# Altium PCB 海关全向控制器主控板电路V3.PcbDoc (part 3 of 3)
Units mil, origin at the board's own origin, x right, y up, seen from the top; angles counter-clockwise.
Board outline 7874.02 x 2362.2 mil, 2 copper layers (Top Layer, Bottom Layer), stack 42.17 mil thick; 192 components, 119 nets, 573 pads, 115 vias.
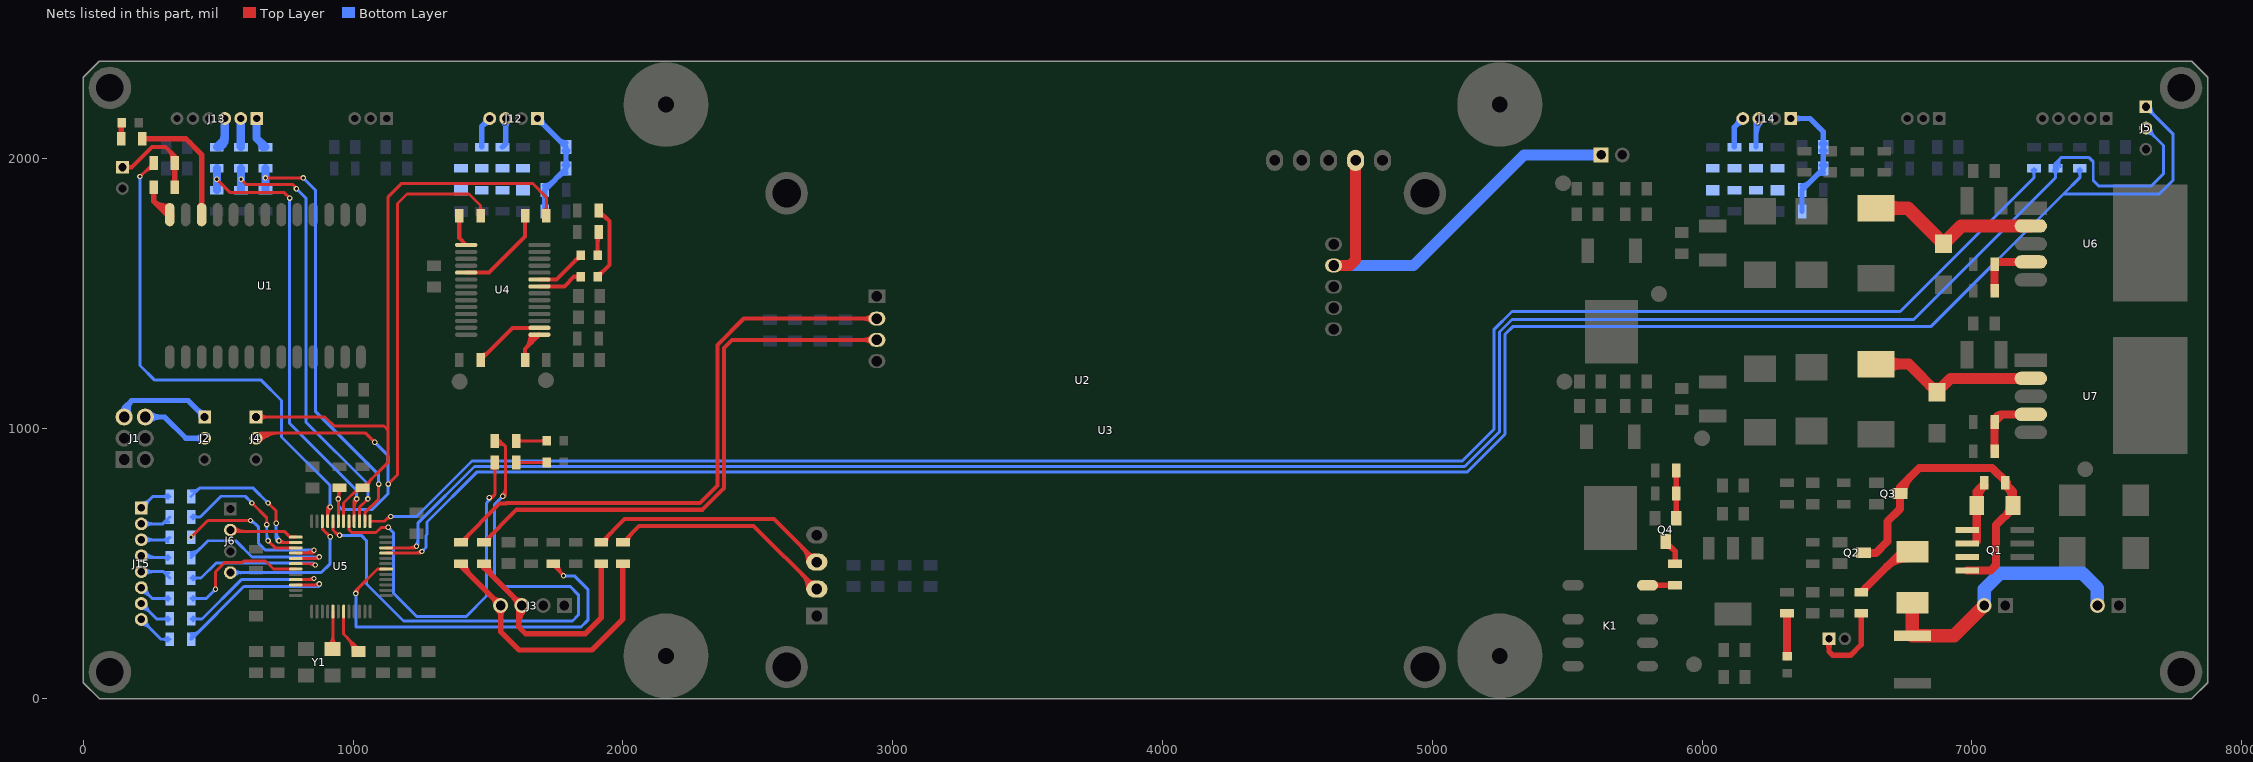
[diagram p3: the nets of this part, all layers, seen from the top]

## Via types
v1: diameter 20, hole 12, Top Layer to Bottom Layer, tented both sides, 70 vias
v2: diameter 60, hole 40, Top Layer to Bottom Layer, tented both sides, 26 vias
v3: diameter 50, hole 30, Top Layer to Bottom Layer, tented both sides, 9 vias
v4: diameter 30, hole 20, Top Layer to Bottom Layer, tented both sides, 5 vias
v5: diameter 40, hole 25, Top Layer to Bottom Layer, tented both sides, 3 vias
v6: diameter 35, hole 20, Top Layer to Bottom Layer, tented both sides, 2 vias

## Nets (pads, with @x,y where several pads share a name; then routed paths per layer and width w, separated by ;. In a path a pad name is that pad's centre, name@x,y a point inside that pad or via, vN(x,y) a via of type N, cw(c..) or ccw(c..) an arc to the next point about the centre after c; other vN are vias at no path point) (continued)
NetC62_2: C62.2 C63.2 J12.1 R45.2 R46.2 | length 633.3
  Bottom Layer w20: J12.1@1683.58,2136.38 cw(c1683.58,2103.49) 1706.84,2126.75 cw(c1730.09,2150) J12.1@1697.2,2150 ; J12.1@1683.58,2150 1789.37,2044.21 C62.2@1789.37,1964.79 1789.37,1964.37 1710.63,1885.63 R45.2@1710.63,1885.21 R46.2@1710.63,1805.63 ; R45.2@1710.63,1900.8 ccw(c1710.63,1937.43) 1736.53,1911.53 ; 1762.49,2071.1 ccw(c1789.37,2097.98) C63.2@1789.37,2059.96 ; 1763.47,1938.47 cw(c1789.37,1912.57) C62.2@1789.37,1949.2 ; C62.2@1782.52,1977.54 ccw(c1765.99,1994.08) 1789.37,1994.08 ccw(c1812.75,1994.08) C62.2@1796.22,1977.54 ; C63.2@1782.52,2031.62 cw(c1765.99,2015.08) 1789.37,2015.08 cw(c1812.75,2015.08) C63.2@1796.22,2031.62
NetC66_1: C66.1 R48.1 R49.1 R54.1
NetC67_1: C67.1 R51.1 R52.1 R55.2
NetC68_2: C68.2 C69.2 J14.1 R59.2 R60.2 | length 688.2
  Bottom Layer w20: J14.1@6328.58,2150 6400,2150 6449.37,2100.63 C69.2@6449.37,2044.37 C68.2@6449.37,1964.79 6449.37,1964.37 6370.63,1885.63 R60.2@6370.63,1885.21 R59.2@6370.63,1805.63 ; J14.1@6338.21,2140.37 cw(c6361.47,2117.11) 6361.47,2150 cw(c6361.47,2182.89) J14.1@6338.21,2159.63 ; R60.2@6370.63,1900.8 ccw(c6370.63,1937.43) 6396.53,1911.53 ; 6423.47,1938.47 cw(c6449.37,1912.57) C68.2@6449.37,1949.2 ; C68.2@6442.52,1977.54 ccw(c6425.99,1994.08) 6449.37,1994.08 ccw(c6472.75,1994.08) C68.2@6456.22,1977.54 ; C69.2@6442.52,2031.62 cw(c6425.99,2015.08) 6449.37,2015.08 cw(c6472.75,2015.08) C69.2@6456.22,2031.62 ; C69.2@6442.52,2057.12 ccw(c6425.99,2073.66) 6449.37,2073.66 ccw(c6472.75,2073.66) C69.2@6456.22,2057.12
NetC70_1: C70.1 R63.1 R64.1 R70.1
NetC71_1: C71.1 R66.1 R67.1 R71.2
NetD1_1: D1.1 R3.1 | length 79.8
  Top Layer w20: R3.1@140.63,2075 140.63,2132.13 D1.1@143.5,2135 ; 140.63,2112.22 cw(c164.32,2112.22) D1.1@147.57,2128.97
NetD2_1: D2.1 R14.2 | length 146.1
  Top Layer w15: D2.1@1900.66,1650.66 ccw(c1886.58,1664.74) 1906.5,1664.74 ccw(c1926.41,1664.74) D2.1@1912.33,1650.66 ; D2.1@1906.5,1642.86 1906.5,1725.95 R14.2@1910.43,1729.88 ; 1906.5,1690.62 cw(c1939.85,1690.62) R14.2@1916.27,1714.21
NetD2_2: D2.2 U4.23 | length 210.3
  Top Layer w15: U4.23@1690.83,1553.39 1753.39,1553.39 1842.86,1642.86 D2.2@1843.5,1642.86 ; 1824.97,1624.97 cw(c1843.5,1606.43) D2.2@1843.5,1632.65
NetD3_1: D3.1 R15.2 | length 345.3
  Top Layer w15: D3.1@1906.5,1563.72 1950,1607.22 1950,1769.46 R15.2@1910.43,1809.03 ; D3.1@1906.5,1573.93 ccw(c1906.5,1598.6) 1923.94,1581.16 ; R15.2@1910.43,1790.94 cw(c1910.43,1747.27) 1941.32,1778.15 ; D3.1@1914.74,1565.68 cw(c1929.9,1565.68) D3.1@1919.18,1576.4
NetD3_2: D3.2 U4.22 | length 198.8
  Top Layer w15: U4.22@1690.83,1527.8 1782.8,1527.8 1818.72,1563.72 D3.2@1843.5,1563.72 ; D3.2@1837.67,1557.88 ccw(c1823.59,1543.8) 1823.59,1563.72 ccw(c1823.59,1583.63) D3.2@1837.67,1569.55
NetD4_2: D4.2 R16.2 | length 191.9
  Top Layer w11: R16.2@1604.37,955 D4.2@1718.5,955 ; R16.2@1611.62,947.75 cw(c1629.11,930.26) 1629.11,955 cw(c1629.11,979.74) R16.2@1611.62,962.25 ; D4.2@1711.26,947.75 ccw(c1693.76,930.26) 1693.76,955 ccw(c1693.76,979.74) D4.2@1711.26,962.25
NetD5_2: D5.2 R17.2 | length 191.9
  Top Layer w11: R17.2@1604.37,875 D5.2@1718.5,875 ; R17.2@1611.62,867.75 cw(c1629.11,850.26) 1629.11,875 cw(c1629.11,899.74) R17.2@1611.62,882.25 ; D5.2@1711.26,867.75 ccw(c1693.76,850.26) 1693.76,875 ccw(c1693.76,899.74) D5.2@1711.26,882.25
NetD7_2: D7.2 L2.1 U6.2 | length 747.5
  Top Layer w50: L2.1@6645,1818.25 6762.53,1818.25 D7.2@6895,1685.79 6960.88,1751.67 U6.2@7218.56,1751.67 ; L2.1@6681.81,1801.13 cw(c6723.14,1759.8) 6723.14,1818.25 cw(c6723.14,1876.71) L2.1@6681.81,1835.38
NetD8_1: D8.1 Q1.4 Q2.3 Q3.3 R22.1 | length 1529.7
  Top Layer w30: Q2.3@6598.31,540 6645,540 6686.65,581.65 6686.65,656.65 6733.31,703.31 Q3.3@6733.31,760 6733.31,783.31 6805,855 7075,855 R22.1@7129.67,800.33 ; Q3.3@6745.87,760 cw(c6832.45,760) 6771.23,821.23 ; Q1.4@6982.64,475 7070,475 7090,495 7090,643.07 7151.93,705 D8.1@7151.93,742.46 ; R22.1@7123.93,789.55 cw(c7084.93,735.08) D8.1@7151.93,735.08 ; R22.1@7124.2,789.43 cw(c7116.01,754.46) 7151.93,754.46 ; R22.1@7124.37,795.02 7151.93,767.46 D8.1@7151.93,742.46 ; D8.1@7128.99,682.06 ccw(c7103.92,707.13) D8.1@7139.37,707.13 ; D8.1@7141.05,729.15 ccw(c7105.46,749.71) 7145.16,760.34 ; D8.1@7143.05,731.75 ccw(c7121.61,753.19) 7151.93,753.19 ccw(c7182.25,753.19) D8.1@7160.81,731.75 ; D8.1@7161.93,732.46 D8.1@7151.93,742.46
NetD9_2: D9.2 L3.1 U7.2 | length 803.3
  Top Layer w40: L3.1@6645,1239.92 6765.87,1239.92 D9.2@6870,1135.79 6920.88,1186.67 U7.2@7218.56,1186.67 ; L3.1@6685.34,1219.26 cw(c6735.21,1169.4) 6735.21,1239.92 cw(c6735.21,1310.45) L3.1@6685.34,1260.58 ; D9.2@6845.33,1160.45 ccw(c6870,1185.12) 6870,1150.24 ccw(c6870,1185.12) D9.2@6894.67,1160.45
NetD10_2: D10.2 R35.2 | length 159.1
  Top Layer w30: D10.2@6315,156.5 R35.2@6315,315.63
NetJ12_3: J12.3 R49.2 | length 179.4
  Bottom Layer w20: R49.2@1553.33,2044.37 1565.47,2056.51 J12.3@1565.47,2150 ; J12.3@1555.84,2140.37 cw(c1532.59,2117.11) 1565.47,2117.11 cw(c1598.36,2117.11) J12.3@1575.1,2140.37 ; R49.2@1559.11,2048.43 ccw(c1543.75,2063.79) 1565.47,2063.79
NetJ12_4: J12.4 R52.2 | length 169.6
  Bottom Layer w20: R52.2@1476.67,2044.37 1476.67,2120.25 J12.4@1506.42,2150 ; J12.4@1492.8,2150 cw(c1459.91,2150) 1483.16,2126.75 cw(c1506.42,2103.49) J12.4@1506.42,2136.38
NetJ13_1: J13.1 R47.1 | length 139.1
  Bottom Layer w30: J13.1@642.64,2150 642.64,2076.73 R47.1@675,2044.37 ; 656.92,2062.45 cw(c638.84,2044.37) R47.1@664.41,2044.37
NetJ13_2: J13.2 R50.1 | length 106.2
  Bottom Layer w30: J13.2@583.58,2150 583.58,2045.79 R50.1@585,2044.37
NetJ13_3: J13.3 R53.1 | length 229.4
  Bottom Layer w30: R53.1@495,2044.37 524.53,2073.9 ; R53.1@504.31,2044.9 ccw(c455.51,2093.7) 524.53,2093.7 ; R53.1@504.58,2045.07 ccw(c493.73,2073.9) 524.53,2073.9 ; R53.1@505.59,2044.37 cw(c531.16,2044.37) 513.08,2062.45 ; J13.3@524.53,2150 524.53,2073.9
NetJ14_3: J14.3 R64.2 | length 163.9
  Bottom Layer w20: R64.2@6200,2044.37 6200,2139.53 J14.3@6210.47,2150 ; 6200,2091.83 cw(c6268.64,2091.83) J14.3@6220.1,2140.37
NetJ14_4: J14.4 R67.2 | length 170.3
  Bottom Layer w20: R67.2@6120,2044.37 6120,2118.58 J14.4@6151.42,2150 ; J14.4@6137.8,2150 cw(c6104.91,2150) 6128.16,2126.75 cw(c6151.42,2103.49) J14.4@6151.42,2136.38
NetJ15_1: J15.1 R61.1 | length 230.8
  Bottom Layer w11: J15.1@215,706.69 257.34,749.03 R61.1@320.63,749.03 ; J15.1@215,724.81 ccw(c215,768.57) 245.94,737.63 ccw(c276.87,706.69) J15.1@233.12,706.69 ; R61.1@313.38,741.78 ccw(c295.89,724.29) 295.89,749.03 ccw(c295.89,773.77) R61.1@313.38,756.28
NetJ15_2: J15.2 R62.1 | length 210.1
  Bottom Layer w11: J15.2@215,647.64 294.81,647.64 ; J15.2@227.81,634.82 cw(c258.75,603.89) 258.75,647.64 cw(c258.75,691.39) J15.2@227.81,660.45 ; R62.1@317.9,653.73 ccw(c311.59,630.86) 294.81,647.64 ; R62.1@320.63,673.45 294.81,647.64
NetJ15_3: J15.3 R65.1 | length 217.1
  Bottom Layer w11: J15.3@215,588.58 311.33,588.58 R65.1@320.63,597.88 ; J15.3@227.81,575.77 cw(c258.75,544.83) 258.75,588.58 cw(c258.75,632.33) J15.3@227.81,601.4 ; 294.57,588.58 cw(c294.57,561.98) R65.1@313.38,580.79 ; 297.21,588.58 ccw(c297.21,611.46) R65.1@313.38,595.28
NetJ15_4: J15.4 R68.1 | length 249.1
  Bottom Layer w11: J15.4@215,529.53 222.22,522.3 R68.1@320.63,522.3 ; J15.4@220.04,534.56 ccw(c249.64,564.16) 249.64,522.3 ; J15.4@227.81,516.71 cw(c241.31,503.22) 241.31,522.3 ; J15.4@227.81,542.34 ccw(c276.19,590.72) 276.19,522.3 ; R68.1@313.38,515.06 ccw(c295.89,497.56) 295.89,522.3 ccw(c295.89,547.04) R68.1@313.38,529.55
NetJ15_5: J15.5 R69.1 | length 205.9
  Bottom Layer w11: J15.5@215,470.47 296.89,470.47 ; J15.5@227.81,457.66 cw(c258.75,426.72) 258.75,470.47 cw(c258.75,514.22) J15.5@227.81,483.29 ; R69.1@317,466.15 cw(c310.28,483.87) 296.89,470.47 ; R69.1@320.63,446.73 296.89,470.47
NetJ15_6: J15.6 R72.1 | length 229.9
  Bottom Layer w11: J15.6@215,393.3 cw(c215,349.54) 245.94,380.48 cw(c276.87,411.42) J15.6@233.12,411.42 ; J15.6@215,411.42 255.27,371.15 R72.1@320.63,371.15 ; R72.1@313.38,363.91 ccw(c295.89,346.41) 295.89,371.15 ccw(c295.89,395.89) R72.1@313.38,378.4
NetJ15_7: J15.7 R73.1 | length 236.7
  Bottom Layer w11: J15.7@215,334.24 cw(c215,290.49) 245.94,321.43 cw(c276.87,352.36) J15.7@233.12,352.36 ; J15.7@215,352.36 271.79,295.58 R73.1@320.63,295.58 ; R73.1@313.38,288.33 ccw(c295.89,270.83) 295.89,295.58 ccw(c295.89,320.32) R73.1@313.38,302.82
NetJ15_8: J15.8 R74.1 | length 243.6
  Bottom Layer w11: J15.8@215,275.19 cw(c215,231.43) 245.94,262.37 cw(c276.87,293.31) J15.8@233.12,293.31 ; J15.8@215,293.31 288.31,220 R74.1@320.63,220 ; R74.1@313.38,212.75 ccw(c295.89,195.26) 295.89,220 ccw(c295.89,244.74) R74.1@313.38,227.25
NetK1_8: K1.8 R29.2 | length 139.4
  Top Layer w20: K1.8@5797.8,419.61 5798.82,420.63 R29.2@5900,420.63 ; K1.8@5824.33,412.76 cw(c5843.33,393.75) 5843.33,420.63 ; K1.8@5824.33,426.45 ccw(c5838.39,440.52) 5838.39,420.63
NetQ4_1: Q4.1 R30.2 R32.1 | length 213.4
  Top Layer w20: Q4.1@5897.52,683.03 ccw(c5880.99,699.56) 5904.37,699.56 ccw(c5927.75,699.56) Q4.1@5911.22,683.03 ; Q4.1@5904.37,668.31 R32.1@5904.37,760 R30.2@5904.37,845
NetQ4_3: Q4.3 R29.1 | length 130.1
  Top Layer w20: Q4.3@5865,564.13 cw(c5865,521.74) 5894.98,551.72 ; Q4.3@5865,581.69 5900,546.69 R29.1@5900,499.37
NetR1_1: R1.1 R2.1 S1.1 | length 472.4
  Top Layer w15: S1.1@145,1969.37 179.37,1969.37 ; S1.1@157.4,1959.06 cw(c179.37,1940.8) 179.37,1969.37 ; S1.1@157.4,1979.68 ccw(c179.37,1997.94) 179.37,1969.37 ; 314.13,2035.87 cw(c273.1,1994.84) R1.1@331.12,1994.84 ; R1.1@334.66,2001.61 ccw(c328.39,2010.63) 339.37,2010.63 ; R1.1@339.37,1985 339.37,2010.63 ; R1.1@344.08,2001.61 cw(c350.35,2010.63) 339.37,2010.63 ; 179.37,1969.37 255,2045 305,2045 339.37,2010.63
  Top Layer w20: R2.1@339.37,1895 R1.1@339.37,1985
NetR2_2: R2.2 U1.34 | length 256.8
  Top Layer w20: R2.2@260.63,1895 260.63,1843.82 ; 286.32,1818.12 ccw(c314.6,1846.4) U1.34@323.36,1807.39 ; U1.34@312.02,1792.43 ccw(c324.02,1804.44) U1.34@327.74,1787.87 ; U1.34@318.98,1826.9 cw(c305.17,1888.36) 260.63,1843.82 ; U1.34@320.67,1783.78 260.63,1843.82
NetR3_2: R3.2 U1.32 | length 505.5
  Top Layer w20: R3.2@219.37,2075 380,2075 438.78,2016.22 U1.32@438.78,1783.78 ; U1.32@433.32,1824.83 ccw(c420.15,1838) 438.78,1838 ccw(c457.41,1838) U1.32@444.24,1824.83
NetR12_1: R12.1 U4.16 | length 302.2
  Top Layer w15: R12.1@1472.32,1255 1591.57,1374.25 U4.16@1690.83,1374.25 ; R12.1@1472.32,1273.09 ccw(c1472.32,1316.76) 1503.21,1285.88
NetR13_1: R13.1 U4.15 | length 251.5
  Top Layer w15: R13.1@1631.84,1270.67 ccw(c1617.76,1284.75) 1637.68,1284.75 ccw(c1657.59,1284.75) R13.1@1643.51,1270.67 ; R13.1@1637.68,1255 1637.68,1295.51 ; U4.15@1656.99,1348.63 cw(c1590.43,1342.76) 1637.68,1295.51 ; 1660.4,1318.24 ccw(c1632.2,1346.44) U4.15@1671.93,1349.95 ; U4.15@1683.13,1340.96 ccw(c1673.97,1350.13) U4.15@1686.87,1351.26 ; U4.15@1690.83,1348.66 1637.68,1295.51
NetR19_1: R19.1 R20.2 U6.4 | length 235.7
  Top Layer w30: R20.2@7084.37,1511.92 R19.1@7084.37,1610 7092.7,1618.33 U6.4@7218.56,1618.33
NetR21_1: R21.1 S2.1 | length 356.3
  Top Layer w20: S2.1@6460.84,211.82 cw(c6437.59,188.56) 6470.47,188.56 cw(c6503.36,188.56) S2.1@6480.1,211.82 ; S2.1@6470.47,221.45 6470.47,174.53 6485,160 6550,160 6590,200 R21.1@6590,315.63
NetR23_1: R23.1 R25.2 U7.4 | length 360.6
  Top Layer w30: R25.2@7084.37,916.92 R23.1@7084.37,1025 7112.7,1053.33 ; R23.1@7084.37,1035.59 ccw(c7084.37,1061.16) 7102.45,1043.08 ; R23.1@7084.9,1034.31 cw(c7130.82,988.39) 7130.82,1053.33 ; R23.1@7085.07,1034.57 cw(c7112.7,1023.6) 7112.7,1053.33 ; U7.4@7218.56,1053.33 7112.7,1053.33
NetR37_2: R37.2 U4.1 | length 150.5
  Top Layer w15: R37.2@1387.75,1774.33 cw(c1373.67,1760.25) 1393.58,1760.25 cw(c1413.5,1760.25) R37.2@1399.41,1774.33 ; R37.2@1393.58,1790 1393.58,1706.93 U4.1@1419.17,1681.34
NetR38_2: R38.2 U4.5 | length 382.5
  Top Layer w15: U4.5@1419.17,1578.98 1503.98,1578.98 1637.68,1712.68 R38.2@1637.68,1790 ; R38.2@1631.84,1774.33 cw(c1617.76,1760.25) 1637.68,1760.25 cw(c1657.59,1760.25) R38.2@1643.51,1774.33
NRST: C19.1 U5.7 | length 268.5
  Top Layer w11: U5.7@964.84,322.68 964.84,239.53 C19.1@1030,174.37 ; 978.63,225.74 cw(c927.26,174.37) C19.1@999.91,174.37 ; 997.41,206.96 cw(c964.82,174.37) C19.1@1010.91,174.37
PAD_D+: J3.3 R6.1 R10.1 | length 1042.7
  Top Layer w20: R10.1@1480.59,500.63 ccw(c1506.16,500.63) 1488.08,482.55 ; R10.1@1485,500.63 1485,485.63 J3.3@1625.63,345 ; R10.1@1500.59,500.63 ccw(c1574.44,500.63) 1522.22,448.41 ; J3.3@1608.07,345 ccw(c1565.68,345) 1595.65,374.98 ccw(c1625.63,404.95) J3.3@1625.63,362.56 ; 1614.51,275.76 cw(c1694.87,275.76) J3.3@1638.05,332.58 ; J3.3@1614.51,345 1614.51,265.49 1640,240 1860,240 1920,300 R6.1@1920,500.63
PAD_D-: J3.4 R4.1 R9.1 | length 1227.3
  Top Layer w20: R9.1@1400,500.63 1400,491.89 J3.4@1546.89,345 1546.89,248.11 1615,180 1885,180 2000,295 R4.1@2000,500.63 ; R9.1@1415.59,500.63 ccw(c1474.33,500.63) 1432.79,459.09 ; J3.4@1529.33,345 ccw(c1486.94,345) 1516.91,374.98 ccw(c1546.89,404.95) J3.4@1546.89,362.56 ; J3.4@1534.47,332.58 cw(c1504.5,302.61) 1546.89,302.61 cw(c1589.28,302.61) J3.4@1559.31,332.58
PADTEST: R7.1 U5.18 | length 1626.3
  Top Layer w11: v1(1010,390) 1010,400 1090.16,480.16 U5.18@1122.32,480.16 ; v1@1014.5,390 cw(c1049.51,390) 1024.75,414.75 ; R7.1@1751.09,500.65 ccw(c1788.53,499.45) 1762.04,472.96 ; R7.1@1762.08,500.3 ccw(c1823.32,498.33) v1(1780,455) R7.1@1745,490 ; v1@1775.5,455 ccw(c1764.64,455) 1772.32,462.68 ccw(c1780,470.36) v1@1780,459.5 ; v1@1775.65,456.16 ccw(c1765.16,458.98) 1774.57,464.41 ccw(c1783.98,469.84) v1@1781.16,459.35 ; R7.1@1745,490 1742,493 R7.1@1742,500.63 1745,497.63 R7.1@1745,490
  Bottom Layer w11: v1@1006.82,386.82 cw(c999.14,379.14) 1010,379.14 cw(c1020.86,379.14) v1@1013.18,386.82 ; v1(1010,390) 1010,265 1845,265 1870,290 1870,405 1820,455 v1(1780,455) ; v1@1783.18,451.82 cw(c1790.86,444.14) 1790.86,455 cw(c1790.86,465.86) v1@1783.18,458.18
POWLEDB1: R62.2 U5.39 | length 692.2
  Top Layer w11: v1@625,720.5 cw(c625,709.64) 632.68,717.32 cw(c640.36,725) v1@629.5,725 ; v1(625,725) 680,670 v1(680,645) ; v1@676.82,648.18 ccw(c669.14,655.86) 680,655.86 ccw(c690.86,655.86) v1@683.18,648.18 ; v1@685,580.5 cw(c685,569.64) 692.68,577.32 cw(c700.36,585) v1@689.5,585 ; v1(685,585) 711.1,558.9 U5.39@787.68,558.9
  Bottom Layer w11: R62.2@399.37,673.45 433.45,673.45 510,750 600,750 v1(625,725) ; R62.2@406.62,666.21 cw(c424.11,648.71) 424.11,673.45 cw(c424.11,698.2) R62.2@406.62,680.7 ; v1@620.5,725 ccw(c609.64,725) 617.32,732.68 ccw(c625,740.36) v1@625,729.5 ; v1@676.82,641.82 cw(c669.14,634.14) 680,634.14 cw(c690.86,634.14) v1@683.18,641.82 ; 680,607.93 ccw(c707.93,607.93) v1@688.18,588.18 ; v1(680,645) 680,590 v1(685,585)
POWLEDB2: R68.2 U5.41 | length 711.6
  Top Layer w11: U5.41@787.68,519.53 869.53,519.53 v1(875,525) ; 850.92,519.53 ccw(c850.92,549.08) v1@871.82,528.18
  Bottom Layer w11: R68.2@399.37,522.3 462.07,585 565,585 625,525 v1(875,525) ; R68.2@399.37,531.39 ccw(c399.37,553.34) R68.2@414.89,537.82 ; R68.2@399.37,542.39 ccw(c399.37,590.9) 433.67,556.6 ; v1@871.82,521.82 ccw(c864.14,514.14) 864.14,525 ccw(c864.14,535.86) v1@871.82,528.18
POWLEDB3: R72.2 U5.43 | length 569.3
  Top Layer w11: v1@486.82,408.18 ccw(c479.14,415.86) 490,415.86 ccw(c500.86,415.86) v1@493.18,408.18 ; v1(490,405) 490,470 525,505 590,505 595,510 675,510 704.84,480.16 U5.43@787.68,480.16
  Bottom Layer w11: R72.2@399.37,371.15 456.15,371.15 v1(490,405) ; R72.2@406.62,363.91 cw(c424.11,346.41) 424.11,371.15 cw(c424.11,395.89) R72.2@406.62,378.4 ; v1@485.5,405 cw(c474.64,405) 482.32,397.32 cw(c490,389.64) v1@490,400.5
POWLEDB4: R74.2 U5.46 | length 785.4
  Top Layer w11: U5.46@787.68,421.1 871.1,421.1 v1(875,425) ; 854.73,421.1 ccw(c854.73,445.27) v1@871.82,428.18
  Bottom Layer w11: R74.2@399.37,229.09 ccw(c399.37,252.56) 415.96,235.96 ; R74.2@399.37,240.09 ccw(c399.37,290.11) 434.74,254.74 ; R74.2@400,220 595,415 870,415 880,425 v1(875,425) ; 839.99,415 ccw(c839.99,460.01) v1@871.82,428.18 ; 866.55,415 ccw(c866.55,433.45) v1@879.6,420.4
POWLEDR1: R61.2 U5.38 | length 720
  Top Layer w11: v1@685,720.5 cw(c685,709.64) 692.68,717.32 cw(c700.36,725) v1@689.5,725 ; v1(685,725) 715,695 v1(715,650) ; v1@711.82,653.18 ccw(c704.14,660.86) 715,660.86 ccw(c725.86,660.86) v1@718.18,653.18 ; v1(725,585) 731.42,578.58 U5.38@787.68,578.58 ; v1@728.18,588.18 ccw(c751.36,611.36) 751.36,578.58
  Bottom Layer w11: R61.2@399.37,749.03 430.34,780 ; R61.2@400.28,769.08 ccw(c403.62,806.71) 430.34,780 ; v1@680.5,725 ccw(c669.64,725) 677.32,732.68 ccw(c685,740.36) v1@685,729.5 ; v1(685,725) 630,780 430.34,780 ; v1@711.82,646.82 cw(c704.14,639.14) 715,639.14 cw(c725.86,639.14) v1@718.18,646.82 ; 715,593.45 ccw(c733.45,593.45) v1@720.4,580.4 ; 715,620.01 ccw(c760.01,620.01) v1@728.18,588.18 ; v1(715,650) 715,595 v1(725,585)
POWLEDR2: R65.2 U5.40 | length 774.2
  Top Layer w11: v1(399.37,597.88) 461.49,660 v1(620,660) ; v1@399.37,602.38 ccw(c399.37,613.24) 407.05,605.56 ccw(c414.73,597.88) v1@403.87,597.88 ; v1@616.82,656.82 ccw(c609.14,649.14) 609.14,660 ccw(c609.14,670.86) v1@616.82,663.18 ; U5.40@787.68,539.21 844.21,539.21 v1(855,550) ; 818.09,539.21 ccw(c818.09,586.91) v1@851.82,553.18 ; 844.65,539.21 ccw(c844.65,560.35) v1@859.6,545.4 ; v1@850.5,550 cw(c839.64,550) 847.32,542.32 cw(c855,534.64) v1@855,545.5
  Bottom Layer w11: v1@620,655.5 cw(c620,632.57) 636.22,648.78 ; v1(620,660) 625,660 650,635 650,575 675,550 v1(855,550) ; v1@851.82,546.82 ccw(c844.14,539.14) 844.14,550 ccw(c844.14,560.86) v1@851.82,553.18
POWLEDR3: R69.2 U5.42 | length 648.5
  Top Layer w11: U5.42@787.68,499.84 855.16,499.84 v1(860,495) ; 837.45,499.84 cw(c837.45,472.45) v1@856.82,491.82
  Bottom Layer w11: R69.2@399.37,446.73 436.73,446.73 492.01,502.01 852.99,502.01 v1(860,495) ; R69.2@406.62,439.48 cw(c424.11,421.99) 424.11,446.73 cw(c424.11,471.47) R69.2@406.62,453.97 ; 832.21,502.01 cw(c832.21,467.21) v1@856.82,491.82
POWLEDR4: R73.2 U5.45 | length 664.7
  Top Layer w11: U5.45@787.68,440.79 850.79,440.79 v1(855,445) ; 833.97,440.79 ccw(c833.97,466.03) v1@851.82,448.18
  Bottom Layer w11: R73.2@400,295 440,295 585.79,440.79 850.79,440.79 v1(855,445) ; R73.2@406.62,288.33 cw(c422.72,272.22) 422.72,295 ; R73.2@406.62,302.82 ccw(c425.5,321.71) 425.5,295 ; 833.97,440.79 ccw(c833.97,466.03) v1@851.82,448.18
SET_RX: J1.6 J2.2 | length 385.8
  Bottom Layer w20: J1.6@230,1043.74 301.26,1043.74 380,965 J2.2@450,965 ; J1.6@245.2,1028.54 cw(c281.9,991.84) 281.9,1043.74 cw(c281.9,1095.64) J1.6@245.2,1058.94 ; J2.2@440.37,955.37 ccw(c417.11,932.11) 417.11,965 ccw(c417.11,997.89) J2.2@440.37,974.63
SET_TX: J1.5 J2.1 | length 552.7
  Bottom Layer w20: J1.5@142.84,1063.52 ccw(c137.41,1076.26) 151.26,1076.26 ; J1.5@151.26,1043.74 151.26,1076.26 ; J1.5@152.62,1044.37 cw(c185.09,1059.45) 159.77,1084.77 ; J1.5@159.68,1063.52 cw(c165.11,1076.26) 151.26,1076.26 ; J1.5@170.75,1052.8 cw(c212.71,1072.29) 180,1105 ; J2.1@436.38,1043.74 ccw(c403.49,1043.74) 426.75,1066.99 ccw(c450,1090.25) J2.1@450,1057.36 ; J2.1@450,1043.74 388.74,1105 180,1105 ; 151.26,1076.26 180,1105
SETBT: R1.2 U5.33 | length 2038.1
  Top Layer w11: v1(210,1935) 210.63,1935 R1.2@260.63,1985 ; v1@210,1939.5 ccw(c210,1951.88) 218.76,1943.13 ; 226.33,1950.7 cw(c260.63,1916.41) R1.2@260.63,1964.91 ; R1.2@245.11,1969.48 cw(c260.63,1953.96) R1.2@260.63,1975.91 ; U5.33@905.79,657.32 905.79,700.79 v1(915,710) ; U5.33@905.79,676.89 cw(c948.11,676.89) v1@918.18,706.82 ; 905.79,703.45 cw(c921.55,703.45) v1@910.4,714.6 ; v1@910.5,710 cw(c899.64,710) 907.32,702.32 cw(c915,694.64) v1@915,705.5
  Bottom Layer w11: v1@206.82,1931.82 cw(c199.14,1924.14) 210,1924.14 cw(c220.86,1924.14) v1@213.18,1931.82 ; v1(210,1935) 210,1235 265,1180 660,1180 735,1105 735,970 915,790 v1(915,710) ; v1@911.82,713.18 ccw(c904.14,720.86) 915,720.86 ccw(c925.86,720.86) v1@918.18,713.18
SETDIG: R44.2 U5.25 | length 7020.5
  Top Layer w11: U5.25@1064.59,657.32 1116.26,657.32 1133.94,675 v1(1140,675) ; 1121.97,663.03 cw(c1140,645) v1@1140,670.5
  Bottom Layer w11: v1(1140,675) 1235,675 1441,881 5111.6,881 5228,997.4 5228,1367.4 5295.6,1435 6734.37,1435 7230,1930.63 R44.2@7230,1965.63 ; v1@1143.18,671.82 cw(c1150.86,664.14) 1150.86,675 cw(c1150.86,685.86) v1@1143.18,678.18 ; R44.2@7222.75,1958.38 cw(c7205.26,1940.89) 7230,1940.89 cw(c7254.74,1940.89) R44.2@7237.25,1958.38
SWCLK: J6.2 U5.37 | length 347.4
  Top Layer w11: J6.2@545,624.37 549.37,620 745,620 766.73,598.27 U5.37@787.68,598.27 ; J6.2@550.04,629.41 ccw(c572.74,652.11) 572.74,620 ; J6.2@557.81,611.56 cw(c578.2,591.17) 578.2,620 ; J6.2@557.81,637.18 ccw(c599.3,678.67) 599.3,620
SWDIO: J6.4 U5.34 | length 671.7
  Top Layer w11: U5.34@886.11,637.24 ccw(c906.29,637.24) 892.02,622.98 ; U5.34@886.1,657.32 886.1,628.9 v1(915,600) ; v1@910.5,600 ccw(c899.64,600) 907.32,607.68 ccw(c915,615.36) v1@915,604.5
  Bottom Layer w11: J6.4@545,466.89 881.89,466.89 915,500 v1(915,600) ; J6.4@557.81,454.08 cw(c588.75,423.14) 588.75,466.89 cw(c588.75,510.64) J6.4@557.81,479.7 ; v1@911.82,596.82 cw(c904.14,589.14) 915,589.14 cw(c925.86,589.14) v1@918.18,596.82
TESTLED1: R16.1 U5.32 | length 2392.3
  Top Layer w11: U5.32@925.47,657.32 925.47,624.53 945,605 v1(950,605) ; 933.78,616.22 ccw(c950,632.43) v1@950,609.5 ; R16.1@1518.42,954.44 cw(c1531.87,937.13) 1547.37,952.63 ; R16.1@1525.17,945.75 cw(c1539.58,927.21) 1556.19,943.81 ; R16.1@1525.63,955 1545,955 ; R16.1@1531.92,937.07 cw(c1547.29,917.29) 1565,935 ; R16.1@1534.1,949.23 cw(c1545,941.82) 1545,955 ; R16.1@1534.1,960.77 ccw(c1545,968.18) 1545,955 ; v1@1551.82,753.18 ccw(c1519.99,785.01) 1565,785.01 ; v1(1555,750) 1565,760 1565,935 ; v1@1555,754.5 ccw(c1555,765.36) 1562.68,757.68 ccw(c1570.36,750) v1@1559.5,750 ; v1@1559.6,745.4 ccw(c1546.55,758.45) 1565,758.45 ; 1545,955 1565,935
  Bottom Layer w11: v1(950,605) 1030,605 1050,585 1050,425 1187,288 1813,288 1835,310 1835,385 1805,415 1560,415 1525,450 1525,720 v1(1555,750) ; v1@953.18,601.82 cw(c960.86,594.14) 960.86,605 cw(c960.86,615.86) v1@953.18,608.18 ; v1@1550.5,750 cw(c1539.64,750) 1547.32,742.32 cw(c1555,734.64) v1@1555,745.5
TESTLED2: R17.1 U5.29 | length 1505.8
  Top Layer w11: U5.29@984.53,657.32 984.53,625.47 994.73,615.27 1085.27,615.27 1105,635 v1(1130,635) ; v1@1126.82,631.82 ccw(c1119.14,624.14) 1119.14,635 ccw(c1119.14,645.86) v1@1126.82,638.18 ; v1(1505,745) 1510,740 1525.63,755.63 ; v1@1505.8,749.43 ccw(c1509.79,771.47) 1525.63,755.63 ; R17.1@1518.38,857.91 cw(c1500.89,840.42) 1525.63,840.42 cw(c1550.37,840.42) R17.1@1532.88,857.91 ; R17.1@1525.63,889.37 R17.1@1525.63,875 1525.63,755.63
  Bottom Layer w11: v1@1130,630.5 cw(c1130,619.64) 1137.68,627.32 cw(c1145.36,635) v1@1134.5,635 ; v1(1130,635) 1150,615 1150,390 1235,305 1420,305 1495,380 1495,725 ; v1@1500.6,744.05 cw(c1480.34,739.66) 1495,725 ; v1(1505,745) 1510,740 1495,725
TTL_RX1: J4.2 R37.1 R39.1 U5.31 | length 2921.3
  Top Layer w11: J4.2@637.26,967.74 cw(c678.92,926.08) 678.92,985 ; J4.2@640,965 660,985 ; J4.2@645.04,959.96 cw(c705.48,899.52) 705.48,985 ; J4.2@646.29,982 ccw(c650.8,994.2) 660,985 ; J4.2@652.81,952.19 cw(c732.03,872.97) 732.03,985 ; J4.2@657,971.29 cw(c669.2,975.8) 660,985 ; v1@941.82,736.82 cw(c933.76,728.76) 945.16,728.76 ; v1@941.82,743.18 ccw(c933.76,751.24) 945.16,751.24 ; U5.31@945.16,657.32 945.16,775.79 R39.1@950,780.63 ; 945.16,729.52 cw(c955.48,729.52) v1@948.18,736.82 ; v1@945.16,744.2 cw(c986.43,744.2) R39.1@957.25,773.38 ; 945.16,750.48 ccw(c955.48,750.48) v1@948.18,743.18 ; 947.49,752.91 ccw(c961.07,749.28) v1@948.9,742.25 ; v1@1075.5,950 ccw(c1064.64,950) 1072.32,957.68 ccw(c1080,965.36) v1@1080,954.5 ; v1(1080,950) 1045,985 660,985 ; v1(1130,795) 1165,830 1165,1835 1200,1870 1430,1870 1472.32,1827.68 R37.1@1472.32,1790 ; v1@1130,799.5 ccw(c1130,810.36) 1137.68,802.68 ccw(c1145.36,795) v1@1134.5,795 ; R37.1@1465.08,1807.09 ccw(c1447.58,1824.58) 1472.32,1824.58 ccw(c1497.06,1824.58) R37.1@1479.57,1807.09
  Bottom Layer w11: v1@941.82,736.82 cw(c934.14,729.14) 945,729.14 cw(c955.86,729.14) v1@948.18,736.82 ; v1(945,740) 945,715 960,700 1070,700 1130,760 v1(1130,795) 1130,900 v1(1080,950) ; v1@1080,945.5 cw(c1080,934.64) 1087.68,942.32 cw(c1095.36,950) v1@1084.5,950 ; v1@1126.82,791.82 cw(c1119.14,784.14) 1130,784.14 cw(c1140.86,784.14) v1@1133.18,791.82 ; v1@1126.82,798.18 ccw(c1119.14,805.86) 1130,805.86 ccw(c1140.86,805.86) v1@1133.18,798.18
TTL_RX3: J5.2 R43.2 U5.22 | length 8064.3
  Top Layer w11: U5.22@1122.32,558.9 1228.9,558.9 v1(1235,565) ; 1209.4,558.9 ccw(c1209.4,590.6) v1@1231.82,568.18
  Bottom Layer w11: v1@1231.82,568.18 ccw(c1212.07,587.93) 1240,587.93 ; v1(1235,565) 1240,570 1240,650.3 1449.7,860 5120.3,860 5249,988.7 5249,1358.7 5295.3,1405 6784.37,1405 7310,1930.63 R43.2@7310,1965.63 7310,1985 ; R43.2@7302.75,1958.38 cw(c7285.26,1940.89) 7310,1940.89 cw(c7334.74,1940.89) R43.2@7317.25,1958.38 ; R43.2@7304.23,1974.1 ccw(c7296.82,1985) 7310,1985 ; R43.2@7310.56,1958.42 cw(c7327.87,1971.87) 7312.37,1987.37 ; R43.2@7315.77,1974.1 cw(c7323.18,1985) 7310,1985 ; R43.2@7319.25,1965.17 cw(c7337.79,1979.58) 7321.19,1996.19 ; R43.2@7327.93,1971.92 cw(c7347.71,1987.29) 7330,2005 ; J5.2@7645,2096.88 cw(c7645,2053.13) 7675.94,2084.06 cw(c7706.87,2115) J5.2@7663.12,2115 ; J5.2@7645,2115 7710,2050 7710,1945 7665,1900 7470,1900 7450,1920 7450,1990 7435,2005 7330,2005 ; 7310,1985 7330,2005
TTL_TX1: J4.1 R38.1 R40.1 U5.30 | length 2688.5
  Top Layer w11: J4.1@640,1043.74 896.26,1043.74 930,1010 1115,1010 1130,995 ; J4.1@652.81,1030.93 cw(c683.75,999.99) 683.75,1043.74 cw(c683.75,1087.49) J4.1@652.81,1056.55 ; U5.30@964.84,657.32 964.84,724.84 1020.63,780.63 R40.1@1035,780.63 1130,875.63 1130,995 ; 999.93,759.93 cw(c1025.16,734.71) R40.1@1025.16,770.38 ; R40.1@1010.86,770.86 ccw(c1001.1,780.63) R40.1@1014.91,780.63 ; R40.1@1044.09,780.63 cw(c1066.04,780.63) R40.1@1050.52,796.15 ; R40.1@1055.09,780.63 cw(c1103.59,780.63) 1069.3,814.93 ; R38.1@1709.17,1807.09 ccw(c1691.68,1824.58) 1716.42,1824.58 ccw(c1741.16,1824.58) R38.1@1723.66,1807.09 ; R38.1@1716.42,1790 1716.42,1858.58 1665,1910 1180,1910 1130,1860 1130,995
TTL_TX3: J5.1 R42.2 U5.21 | length 8049
  Top Layer w11: U5.21@1122.32,539.21 1249.21,539.21 v1(1255,545) ; 1230.16,539.21 ccw(c1230.16,569.84) v1@1251.82,548.18
  Bottom Layer w11: v1(1255,545) 1270,560 1270,605 1274,609 1274,654.6 1458.4,839 5129,839 5270,980 5270,1350 5300,1380 6849.37,1380 7339.37,1870 ; v1@1255,549.5 ccw(c1255,560.36) 1262.68,552.68 ccw(c1270.36,545) v1@1259.5,545 ; R42.2@7392.75,1958.38 cw(c7375.26,1940.89) 7400,1940.89 cw(c7424.74,1940.89) R42.2@7407.25,1958.38 ; R42.2@7400,1965.63 7400,1930.63 7339.37,1870 ; J5.1@7645,2175.62 cw(c7645,2131.87) 7675.94,2162.8 cw(c7706.87,2193.74) J5.1@7663.12,2193.74 ; J5.1@7645,2193.74 7745,2093.74 7745,1920 7695,1870 7339.37,1870
V1_N: R4.2 U2.2 | length 998.1
  Top Layer w15: R4.2@2000,579.37 2060.63,640 2484.76,640 U2.2@2718.78,405.98 ; R4.2@2018.09,579.37 cw(c2061.76,579.37) 2030.88,610.25 ; 2664.37,460.39 cw(c2609.97,405.98) U2.2@2686.91,405.98 ; 2683.38,441.38 ccw(c2710.91,468.9) U2.2@2710.91,429.98 ; 2689.98,434.78 cw(c2661.18,405.98) U2.2@2701.91,405.98
V1_P: R6.2 U2.3 | length 1057.4
  Top Layer w15: R6.2@1920,579.37 2005.63,665 2559.76,665 U2.3@2718.78,505.98 ; R6.2@1938.09,579.37 cw(c1981.76,579.37) 1950.88,610.25 ; 2664.37,560.39 cw(c2609.97,505.98) U2.3@2686.91,505.98 ; 2683.38,541.38 ccw(c2710.91,568.9) U2.3@2710.91,529.98 ; 2689.98,534.78 cw(c2661.18,505.98) U2.3@2701.91,505.98
V2_N: R9.2 U3.2 | length 2292.9
  Top Layer w15: R9.2@1400,579.37 1543.37,722.74 1543.61,722.5 1566.39,722.5 1568.89,725 2285,725 2350,790 2350,1310.36 2448.03,1408.39 U3.2@2941.57,1408.39 ; R9.2@1418.09,579.37 cw(c1461.76,579.37) 1430.88,610.25 ; U3.2@2922.88,1395.59 ccw(c2891.99,1364.71) 2891.99,1408.39 ccw(c2891.99,1452.06) U3.2@2922.88,1421.18
V2_P: R10.2 U3.3 | length 2175.1
  Top Layer w15: R10.2@1485,579.37 1605.63,700 2295.36,700 2375,779.64 2375,1300 2404.65,1329.65 U3.3@2941.57,1329.65 ; R10.2@1503.09,579.37 cw(c1546.76,579.37) 1515.88,610.25 ; U3.3@2922.88,1316.85 ccw(c2891.99,1285.97) 2891.99,1329.65 ccw(c2891.99,1373.32) U3.3@2922.88,1342.44
VBAT+: D6.1 F1.1 J7.2 J8.2 | length 1026.3
  Top Layer w50: F1.1@6780,355.51 D6.1@6780,233.58 6934.21,233.58 J8.2@7045.63,345
  Bottom Layer w50: J8.2@7045.63,345 7045.63,405.63 7105,465 7410,465 7465.63,409.37 J7.2@7465.63,345
VCC: D8.2 F1.2 Q1.1 Q1.2 Q1.3 R21.2 R22.2 | length 846.4
  Top Layer w30: R21.2@6590,394.37 6740.12,544.49 F1.2@6780,544.49 ; R21.2@6600.59,394.37 cw(c6626.16,394.37) 6608.08,412.45 ; 6684.23,488.6 cw(c6760.32,412.52) F1.2@6760.32,520.12 ; D8.2@7009.19,698.25 cw(c6987.75,676.81) 7018.07,676.81 cw(c7048.39,676.81) D8.2@7026.95,698.25 ; D8.2@7009.19,731.75 ccw(c6987.75,753.19) 7018.07,753.19 ccw(c7048.39,753.19) D8.2@7026.95,731.75 ; D8.2@7011.79,733.75 ccw(c6996.16,760.82) 7026.35,752.73 ; Q1.2@7018.07,583.18 7018.07,705 7018.07,767.46 R22.2@7045.63,795.02 ; D8.2@7018.07,721.82 cw(c7113.97,721.82) R22.2@7046.16,789.63 ; 7018.07,754.46 cw(c7053.99,754.46) R22.2@7045.8,789.43 ; 7026.01,751.45 ccw(c7054.4,743.85) D8.2@7028.95,729.15
VEDIO: J16.1 U2.8 U3.6 | length 1619.9
  Top Layer w40: U3.6@4634.49,1605.24 4695.24,1605.24 4715.78,1625.78 U2.8@4715.78,1994.98
  Bottom Layer w40: U3.6@4634.49,1605.24 4930.24,1605.24 5340,2015 J16.1@5625.63,2015
VEDIO_CH1: R47.2 R58.2 U5.26 | length 1716.5
  Top Layer w11: v1(675,1930) v1(815,1930) ; v1@678.18,1926.82 cw(c685.86,1919.14) 685.86,1930 cw(c685.86,1940.86) v1@678.18,1933.18 ; v1@811.82,1926.82 ccw(c804.14,1919.14) 804.14,1930 ccw(c804.14,1940.86) v1@811.82,1933.18 ; U5.26@1043.58,657.32 1043.58,688.58 1095,740 v1(1095,795) ; v1@1091.82,791.82 cw(c1084.14,784.14) 1095,784.14 cw(c1105.86,784.14) v1@1098.18,791.82
  Bottom Layer w11: v1@815,1925.5 cw(c815,1914.64) 822.68,1922.32 cw(c830.36,1930) v1@819.5,1930 ; v1(815,1930) 860,1885 860,1065 1095,830 v1(1095,795) ; v1@1091.82,798.18 ccw(c1084.14,805.86) 1095,805.86 ccw(c1105.86,805.86) v1@1098.18,798.18
  Bottom Layer w30: R58.2@675,1884.37 v1(675,1930) R47.2@675,1965.63
VEDIO_CH2: R50.2 R57.2 U5.27 | length 1740.1
  Top Layer w11: v1@585,1920.5 cw(c585,1909.64) 592.68,1917.32 cw(c600.36,1925) v1@589.5,1925 ; v1(585,1925) 605,1905 777.5,1905 791.25,1891.25 v1(790,1890) ; 780.55,1901.95 cw(c768.6,1890) v1@785.5,1890 ; U5.27@1023.9,657.32 1023.9,708.9 v1(1055,740) ; v1@1050.5,740 cw(c1039.64,740) 1047.32,732.32 cw(c1055,724.64) v1@1055,735.5
  Bottom Layer w11: v1@790,1885.5 cw(c790,1874.64) 797.68,1882.32 cw(c805.36,1890) v1@794.5,1890 ; v1(790,1890) 825,1855 825,1025 1055,795 v1(1055,740) ; v1@1051.82,743.18 ccw(c1044.14,750.86) 1055,750.86 ccw(c1065.86,750.86) v1@1058.18,743.18
  Bottom Layer w30: R57.2@585,1884.37 v1(585,1925) R50.2@585,1965.63
VEDIO_CH3: R53.2 R56.2 U5.28 | length 1815.2
  Top Layer w11: v1@495,1920.5 cw(c495,1909.64) 502.68,1917.32 cw(c510.36,1925) v1@499.5,1925 ; v1(495,1925) 545,1875 745,1875 v1(765,1855) ; v1@760.5,1855 ccw(c749.64,1855) 757.32,1862.68 ccw(c765,1870.36) v1@765,1859.5 ; U5.28@1004.21,657.32 1004.21,730.86 v1(1013.36,740) ; 1004.21,707.06 cw(c1046.3,707.06) v1@1016.54,736.82 ; 1004.21,733.62 cw(c1019.74,733.62) v1@1008.76,744.6 ; v1@1008.86,740 cw(c997.99,740) 1005.67,732.32 cw(c1013.36,724.64) v1@1013.36,735.5
  Bottom Layer w11: v1@761.82,1851.82 cw(c754.14,1844.14) 765,1844.14 cw(c775.86,1844.14) v1@768.18,1851.82 ; v1(765,1855) 765,1020 1013.36,771.64 v1(1013.36,740) ; v1@1010.17,743.18 ccw(c1002.49,750.86) 1013.36,750.86 ccw(c1024.22,750.86) v1@1016.54,743.18
  Bottom Layer w30: R56.2@495,1884.37 v1(495,1925) R53.2@495,1965.63
XTAL: U5.5 Y1.3 | length 215.2
  Top Layer w11: Y1.3@910.01,198.42 ccw(c872.67,235.76) 925.47,235.76 ; Y1.3@924.21,184.21 925.47,185.47 U5.5@925.47,322.68 ; 925.47,229.67 ccw(c969.67,229.67) Y1.3@938.42,198.42
pads on no net: J13.6 K1.2 K1.7 U1.3 U1.4 U1.5 U1.6 U1.7 U1.8 U1.9 U1.10 U1.11 U1.22 U1.23 U1.24 U1.25 U1.26 U1.27 U1.28 U1.29 U1.30 U1.31 U1.33 U2. U2.6 U2.7 U2.9 U3. U3.5 U3.7 U3.8 U4.2 U4.3 U4.6 U4.8 U4.9 U4.10 U4.11 U4.12 U4.13 U4.14 U4.19 U4.24 U4.27 U4.28 U5.2 U5.3 U5.4 U5.6 Y1.1

## Polygon pours and split planes (outlines as drawn)
GND on Top Layer "Keep-Out Layer-No Net" (solid, remove dead copper, pour order 4): -155,2475 -140,2490 8085,2490 8085,-35 8050,-70 8040,-80 -190,-80
GND on Bottom Layer "Keep-Out Layer-No Net" (solid, remove dead copper, pour order 6): -125,2550 8030,2550 8070,2590 8140,2520 8140,0 8140,-80 8080,-140 8060,-160 -185,-160

## Keep-outs
Keep-Out Layer:
  the board outline again, w10

## Other copper
Top Layer:
  rectangle net VCC: 6720,515 7030,645
  rectangle net +12V: 7305,430 7440,830
  rectangle net +12V: 7140,430 7440,615
  rectangle net GND: 7530,225 7795,1910
Bottom Layer:
  rectangle net NetC71_1: 6015,1870 6145,1980
  rectangle net NetC70_1: 6175,1865 6305,1980
  rectangle net NetC66_1: 1530,1870 1650,1980
  rectangle net NetC67_1: 1375,1870 1500,1980

## Silkscreen, mask and mechanical layers (free items; w line width, h text height)
Top Overlay:
  text "+5V_A1" at 5505,1955 h60 r90
  text "+7.2V" at 5885,1430 h80
  text "+5V_A2" at 5525,1215 h60 r90
  text "+5V" at 6005,880 h80
  text "+12V" at 7470,830 h80
  text "+" at 435,685 h80
  text "+3.3V" at 5855,20 h80